# EAGLE board project-alpha (EAGLE 6.4)

Size 68.58 x 53.34 mm. Coordinates in mm from the lower left corner, seen from the top.
Outline: 66.04,2.54 68.58,5.08 68.58,38.1 66.04,40.64 66.04,52.07 64.77,53.34 1,53.34 arc90 0,52.34 0,1 arc90 1,0 65.04,0 arc90 66.04,1 66.04,2.54
Copper layers ((1+2)*15+16): Top 0.02mm / dielectric 0.17mm / Route2 0.02mm / dielectric 1.2mm / Route15 0.02mm / dielectric 0.17mm / Bottom 0.02mm
Design rules "default *": minimum track width 10mil, minimum drill 24mil, track to track 8mil, track to pad 8mil, pad to pad 8mil, via to via 8mil, smd to smd 8mil, copper to edge 40mil, drill to drill 8mil, minimum pad ring 10mil, minimum via ring 8mil, stop-mask expansion 4mil, vias tented up to drill 0mil, thermal gap 10mil

## Footprints (pad centres in the part's own frame; a part is rotated, then mirrored left to right if it is on the bottom)
1X06 = drill 1.016 long: 1 -6.35,0; 2 -3.81,0; 3 -1.27,0; 4 1.27,0; 5 3.81,0; 6 6.35,0
C0402 = smd 0.7 x 0.9: 1 -0.65,0; 2 0.65,0
1X10 = drill 1.016 long: 1 -11.43,0; 2 -8.89,0; 3 -6.35,0; 4 -3.81,0; 5 -1.27,0; 6 1.27,0; 7 3.81,0; 8 6.35,0; 9 8.89,0; 10 11.43,0
1X08 = drill 1.016 long: 1 -8.89,0; 2 -6.35,0; 3 -3.81,0; 4 -1.27,0; 5 1.27,0; 6 3.81,0; 7 6.35,0; 8 8.89,0
_0402 = smd 0.6 x 0.6: 1 -0.508,0; 2 0.508,0
CHIPLED_0603_NOOUTLINE = smd 0.8 x 0.8: A 0,-0.75; C 0,0.75
R0402 = smd 0.7 x 0.9: 1 -0.65,0; 2 0.65,0
SOLDERJUMPER_CLOSEDWIRE = smd 1.168 x 1.6: 1 -0.762,0; 2 0.762,0 | smd 0.635 x 0.203: WIRE 0,0
TESTPOINT_SMT = smd 4.7 x 3.4: P$1 0,0
CC3000-LGA = smd 1.2 x 0.7: 1 -5.85,5.4; 2 -5.85,4.2; 3 -5.85,3; 4 -5.85,1.8; 5 -5.85,0.6; 6 -5.85,-0.6; 7 -5.85,-1.8; 8 -5.85,-3; 9 -5.85,-4.2; 10 -5.85,-5.4; 19 5.85,-5.4; 20 5.85,-4.2; 21 5.85,-3; 22 5.85,-1.8; 23 5.85,-0.6; 24 5.85,0.6; 25 5.85,1.8; 26 5.85,3; 27 5.85,4.2; 28 5.85,5.4 | smd 0.7 x 1.2: 11 -4.2,-7.25; 12 -3,-7.25; 13 -1.8,-7.25; 14 -0.6,-7.25; 15 0.6,-7.25; 16 1.8,-7.25; 17 3,-7.25; 18 4.2,-7.25; 29 4.2,7.25; 30 3,7.25; 31 1.8,7.25; 32 0.6,7.25; 33 -0.6,7.25; 34 -1.8,7.25; 35 -3,7.25; 36 -4.2,7.25 | smd 2.4 x 1.9: 37 -2.15,3.6; 38 -2.15,0; 39 -2.15,-3.6; 40 2.15,3.6; 41 2.15,0; 42 2.15,-3.6 | smd 1.2 x 1.2: 43 -5.85,7.25; 44 -5.85,-7.25; 45 5.85,-7.25; 46 5.85,7.25
SOT223-R = smd 1.3 x 1.3: 1 -2.3,-3.05; 2 0,-3.05; 3 2.3,-3.05 | smd 3.6 x 1.3: 4 0,3.05
TSSOP20 = smd 0.305 x 0.991: 1 -2.925,-2.918; 2 -2.275,-2.918; 3 -1.625,-2.918; 4 -0.975,-2.918; 5 -0.325,-2.918; 6 0.325,-2.918; 7 0.975,-2.918; 8 1.625,-2.918; 9 2.275,-2.918; 10 2.925,-2.918; 11 2.925,2.918; 12 2.275,2.918; 13 1.625,2.918; 14 0.975,2.918; 15 0.325,2.918; 16 -0.325,2.918; 17 -0.975,2.918; 18 -1.625,2.918; 19 -2.275,2.918; 20 -2.925,2.918
TSSOP8 = smd 1.2 x 0.305: 1 -2.2,0.975; 2 -2.2,0.325; 3 -2.2,-0.325; 4 -2.2,-0.975; 5 2.2,-0.975; 6 2.2,-0.325; 7 2.2,0.325; 8 2.2,0.975
MICROSD = smd 0.7 x 1.5: 1 9,-10.64; 2 7.9,-10.24; 3 6.8,-10.64; 4 5.7,-11.04; 5 4.6,-10.64; 6 3.5,-11.04; 7 2.4,-10.64; 8 1.3,-10.64 | smd 1.8 x 1.4: CD1 2,-0.44; CD2 8,-0.44 | smd 1.4 x 1.9: MT1 0.4,-13.54; MT2 13.6,-14.44

## Placement (x,y rotation side)
ANAPORT  [1X06]  8.13,-3.68 0 top  (outside the outline)
C1  [C0402]  -35.43,-45.47 0 top  (outside the outline)
C2  [C0402]  -39.12,-86.49 0 top  (outside the outline)
DIGHIPORT  [1X10]  13.21,-20.45 0 top  (outside the outline)
DIGLOPORT  [1X08]  10.67,-14.86 0 top  (outside the outline)
L1  [_0402]  -39.12,-80.01 0 top  (outside the outline)
L2  [_0402]  -39.12,-83.06 0 top  (outside the outline)
LED1  [CHIPLED_0603_NOOUTLINE]  -38.73,-51.82 0 top  (outside the outline)
PWRPORT  [1X08]  14.73,11.05 0 top
R1  0  [R0402]  -19.94,-40.39 0 top  (outside the outline)
R2  0  [R0402]  -39.12,-59.82 0 top  (outside the outline)
SJ1  [SOLDERJUMPER_CLOSEDWIRE]  -34.8,-49.02 0 top  (outside the outline)
SJ2  [SOLDERJUMPER_CLOSEDWIRE]  -34.8,-52.58 0 top  (outside the outline)
SJ3  [SOLDERJUMPER_CLOSEDWIRE]  -38.48,-56.13 0 top  (outside the outline)
SJ4  [SOLDERJUMPER_CLOSEDWIRE]  -38.48,-69.72 0 top  (outside the outline)
SJ5  [SOLDERJUMPER_CLOSEDWIRE]  -38.48,-73.28 0 top  (outside the outline)
SJ6  [SOLDERJUMPER_CLOSEDWIRE]  -38.48,-76.83 0 top  (outside the outline)
TPRX  [TESTPOINT_SMT]  -37.72,-93.98 0 top  (outside the outline)
TPTX  [TESTPOINT_SMT]  -37.72,-89.66 0 top  (outside the outline)
U1  CC3000-MOD  [CC3000-LGA]  -6.99,-11.81 0 top  (outside the outline)
U2  TLV1117-33  [SOT223-R]  -18.03,-26.8 0 top  (outside the outline)
U3  TXS0108E  [TSSOP20]  -16.76,-34.29 0 top  (outside the outline)
U4  24AA512  [TSSOP8]  -37.72,-65.79 0 top  (outside the outline)
U$2  MICROSD  [MICROSD]  -35.94,-22.23 0 top  (outside the outline)

## Library data of the parts
ANAPORT DIGHIPORT DIGLOPORT PWRPORT = pinhead
C1 R1 R2 = resistor
C2 = rcl
L1 L2 LED1 SJ1-SJ6 TPRX TPTX = microbuilder
U1-U4 = eightbitlabs
U$2 = adafruit

## Nets
+3V3: PWRPORT.4 R1.1 R2.1 U1.23 U2.2 U3.2 U$2.4
+5V: U3.10 U3.19 U4.8
GND: L1.1 L2.1 PWRPORT.6 PWRPORT.7 SJ4.1 SJ5.1 SJ6.1 U1.1 U1.9 U1.10 U1.11 U1.16 U1.18 U1.20 U1.22 U1.25 U1.31 U1.32 U1.33 U1.34 U1.36 U1.37 U1.38 U1.39 U1.40 U1.41 U1.42 U1.43 U1.44 U1.45 U1.46 U2.1 U2.4 U3.11 U4.4 U4.7 U$2.6 U$2.MT1 U$2.MT2
N$1: PWRPORT.5 U2.3
N$2: U1.12 U3.1
N$3: U1.17 U3.3 U$2.5
N$4: U1.15 U3.4 U$2.3
N$5: U1.13 U3.5 U$2.7
N$6: U1.14 U3.6
N$7: U1.26 U3.7
N$8: C1.2 U1.35
N$9: R1.2 U1.19
N$10: C1.1 C2.1 L1.2
N$11: DIGHIPORT.6 U3.16
N$12: U1.27 U1.29
N$13: U1.28 U1.30
N$14: DIGHIPORT.7 U3.17
N$15: DIGHIPORT.5 U3.18
N$16: U3.8 U$2.2
N$17: SJ1.1 U3.20
N$18: DIGHIPORT.8 SJ1.2
N$19: SJ2.1 U3.13
N$20: DIGLOPORT.4 SJ2.2
N$21: LED1.A R2.2
N$22: LED1.C SJ3.1
N$23: DIGLOPORT.5 SJ3.2
N$24: SJ4.2 U4.1
N$25: SJ5.2 U4.2
N$26: SJ6.2 U4.3
N$27: DIGHIPORT.1 U4.6
N$28: DIGHIPORT.2 U4.5
N$29: C2.2 L2.2
N$30: TPTX.P$1 U1.6
N$31: TPRX.P$1 U1.8

## Tracks (layer width: path | path; a pad name or v marks a point on that pad's centre or on a via)
+3V3  (6 unrouted)
+5V  (2 unrouted)
GND  (38 unrouted)
N$1  (1 unrouted)
N$2  (1 unrouted)
N$3  (2 unrouted)
N$4  (2 unrouted)
N$5  (2 unrouted)
N$6  (1 unrouted)
N$7  (1 unrouted)
N$8  (1 unrouted)
N$9  (1 unrouted)
N$10  (2 unrouted)
N$11  (1 unrouted)
N$12  (1 unrouted)
N$13  (1 unrouted)
N$14  (1 unrouted)
N$15  (1 unrouted)
N$16  (1 unrouted)
N$17  (1 unrouted)
N$18  (1 unrouted)
N$19  (1 unrouted)
N$20  (1 unrouted)
N$21  (1 unrouted)
N$22  (1 unrouted)
N$23  (1 unrouted)
N$24  (1 unrouted)
N$25  (1 unrouted)
N$26  (1 unrouted)
N$27  (1 unrouted)
N$28  (1 unrouted)
N$29  (1 unrouted)
N$30  (1 unrouted)
N$31  (1 unrouted)